# EAGLE board eeprom_programmer (EAGLE 9.6.2)
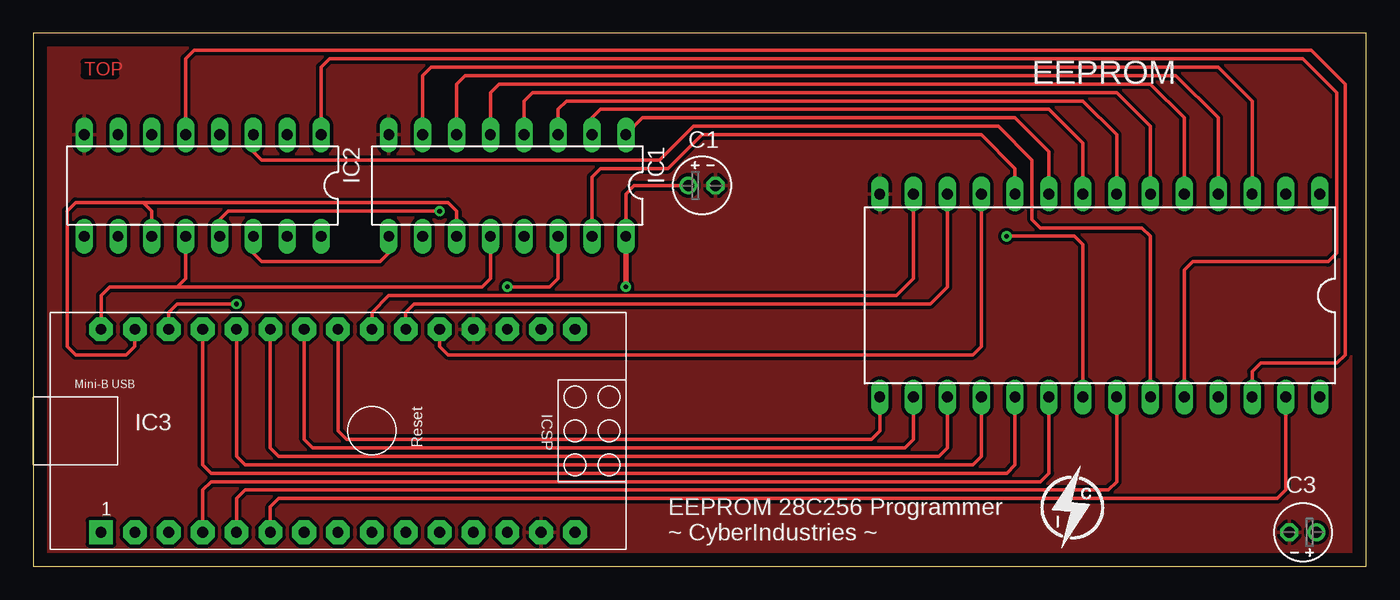
[diagram p0: board, top side]
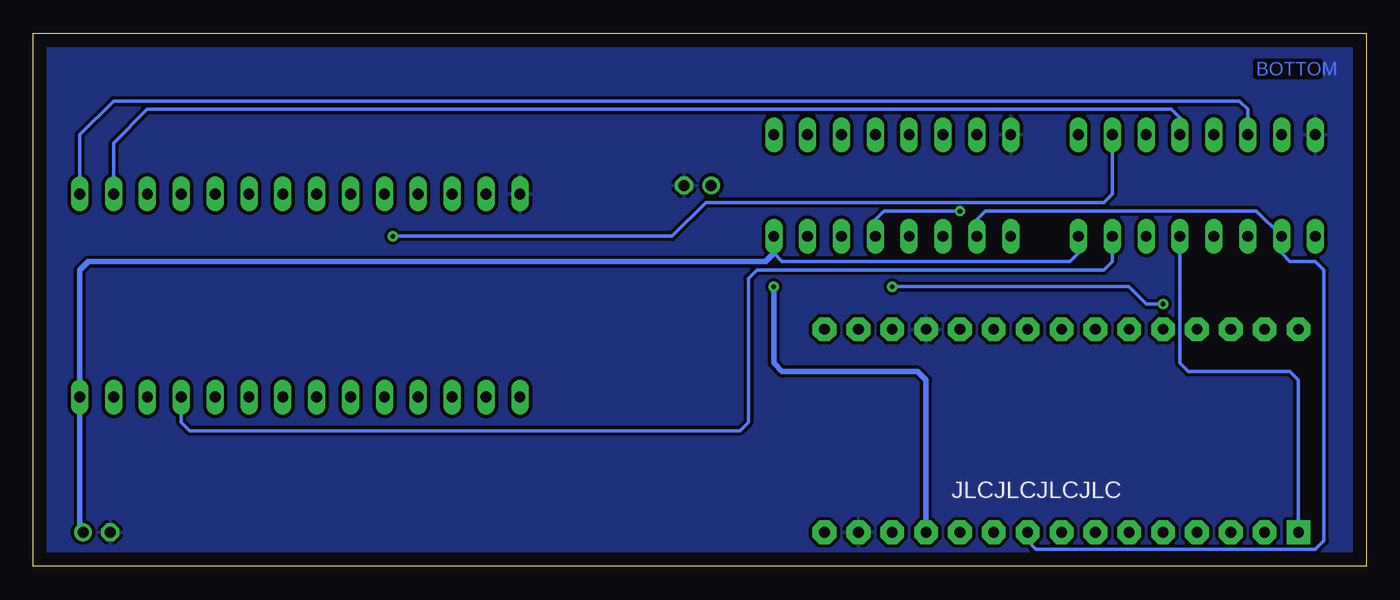
[diagram p1: board, bottom side, seen from below]

Size 100 x 40 mm. Coordinates in mm from the lower left corner, seen from the top.
Outline: 0,0 100,0 100,40 0,40 0,0
Copper layers (1*16): Top 0.035mm / dielectric 1.5mm / Bottom 0.035mm
Design rules "default": minimum track width 6mil, minimum drill 0.35mm, track to track 6mil, track to pad 6mil, pad to pad 6mil, via to via 6mil, smd to smd 6mil, copper to edge 40mil, drill to drill 6mil, minimum pad ring 10mil, minimum via ring 8mil, stop-mask expansion 4mil, vias tented up to drill 0mil, thermal gap 10mil

## Footprints (pad centres in the part's own frame; a part is rotated, then mirrored left to right if it is on the bottom)
E2-4 = drill 0.813 pad 1.27: + -1.016,0 | drill 0.813 pad 1.27 octagon: - 1.016,0
DIL28-6 = drill 0.813 long: 1 -16.51,-7.62; 2 -13.97,-7.62; 3 -11.43,-7.62; 4 -8.89,-7.62; 5 -6.35,-7.62; 6 -3.81,-7.62; 7 -1.27,-7.62; 8 1.27,-7.62; 9 3.81,-7.62; 10 6.35,-7.62; 11 8.89,-7.62; 12 11.43,-7.62; 13 13.97,-7.62; 14 16.51,-7.62; 15 16.51,7.62; 16 13.97,7.62; 17 11.43,7.62; 18 8.89,7.62; 19 6.35,7.62; 20 3.81,7.62; 21 1.27,7.62; 22 -1.27,7.62; 23 -3.81,7.62; 24 -6.35,7.62; 25 -8.89,7.62; 26 -11.43,7.62; 27 -13.97,7.62; 28 -16.51,7.62
DIL16 = drill 0.813 long: 1 -8.89,-3.81; 2 -6.35,-3.81; 3 -3.81,-3.81; 4 -1.27,-3.81; 5 1.27,-3.81; 6 3.81,-3.81; 7 6.35,-3.81; 8 8.89,-3.81; 9 8.89,3.81; 10 6.35,3.81; 11 3.81,3.81; 12 1.27,3.81; 13 -1.27,3.81; 14 -3.81,3.81; 15 -6.35,3.81; 16 -8.89,3.81
ARDUINO_NANO = drill 0.8 pad 1.778 square: 1 -20.32,-7.62 | drill 0.8 pad 1.778 octagon: 2 -17.78,-7.62; 3 -15.24,-7.62; 4 -12.7,-7.62; 5 -10.16,-7.62; 6 -7.62,-7.62; 7 -5.08,-7.62; 8 -2.54,-7.62; 9 0,-7.62; 10 2.54,-7.62; 11 5.08,-7.62; 12 7.62,-7.62; 13 10.16,-7.62; 14 12.7,-7.62; 15 15.24,-7.62; 16 15.24,7.62; 17 12.7,7.62; 18 10.16,7.62; 19 7.62,7.62; 20 5.08,7.62; 21 2.54,7.62; 22 0,7.62; 23 -2.54,7.62; 24 -5.08,7.62; 25 -7.62,7.62; 26 -10.16,7.62; 27 -12.7,7.62; 28 -15.24,7.62; 29 -17.78,7.62; 30 -20.32,7.62

## Placement (x,y rotation side)
C1  1uF  [E2-4]  50.16,28.57 0 top
C3  1uF  [E2-4]  95.25,2.54 180 top
EEPROM  AT28C256-28DIP  [DIL28-6]  80.01,20.32 180 top
IC1  74HC595N  [DIL16]  35.56,28.57 180 top
IC2  74HC595N  [DIL16]  12.7,28.57 180 top
IC3  [ARDUINO_NANO]  25.4,10.16 0 top
U$1  LOGO-CYBERINDUSTRIES"  [LOGO-SMALL]  75.56,1.27 0 top

## Library data of the parts
C1 C3 = ITIS
EEPROM = atmel-custom
IC1 IC2 = 74xx-eu
IC3 = CiniTechLibrary
U$1 = CyberLibrary

## Nets
A0: EEPROM.10 IC1.15
A1: EEPROM.9 IC1.1
A2: EEPROM.8 IC1.2
A3: EEPROM.7 IC1.3
A4: EEPROM.6 IC1.4
A5: EEPROM.5 IC1.5
A6: EEPROM.4 IC1.6
A7: EEPROM.3 IC1.7
A8: EEPROM.25 IC2.15
A9: EEPROM.24 IC2.1
A10: EEPROM.21 IC2.2
A11: EEPROM.23 IC2.3
A12: EEPROM.2 IC2.4
A13: EEPROM.26 IC2.5
A14: EEPROM.1 IC2.6
A15: IC2.7
CE: EEPROM.20 IC3.4
G: IC1.13 IC2.13 IC3.1
GND: C1.- C3.- EEPROM.14 IC1.8 IC2.8 IC3.14 IC3.19
IO0: EEPROM.11 IC3.20
IO1: EEPROM.12 IC3.21
IO2: EEPROM.13 IC3.22
IO3: EEPROM.15 IC3.23
IO4: EEPROM.16 IC3.24
IO5: EEPROM.17 IC3.25
IO6: EEPROM.18 IC3.26
IO7: EEPROM.19 IC3.27
N$1: IC1.9 IC2.14
OE: EEPROM.22 IC3.5
RCK: IC1.12 IC2.12 IC3.30
SCK: IC1.11 IC2.11 IC3.29
SCL: IC1.10 IC2.10 IC3.9
SER: IC1.14 IC3.28
VCC: C1.+ C3.+ EEPROM.28 IC1.16 IC2.16 IC3.12
VIN: IC3.15
WE: EEPROM.27 IC3.6

## Tracks (layer width: path | path; a pad name or v marks a point on that pad's centre or on a via)
A0
  Top 0.254: IC1.15 41.91,29.21 42.55,29.84 47.62,29.84 50.16,32.38 71.12,32.38 73.66,29.84 EEPROM.10
A1
  Top 0.254: EEPROM.9 76.2,31.11 73.66,33.66 45.72,33.66 IC1.1
A2
  Top 0.254: EEPROM.8 78.74,31.75 76.2,34.29 42.55,34.29 41.91,33.66 IC1.2
A3
  Top 0.254: EEPROM.7 81.28,32.38 78.74,34.92 40.01,34.92 39.37,34.29 IC1.3
A4
  Top 0.254: EEPROM.6 83.82,33.02 81.28,35.56 37.47,35.56 36.83,34.92 IC1.4
A5
  Top 0.254: EEPROM.5 86.36,33.66 83.82,36.2 34.92,36.2 34.29,35.56 IC1.5
A6
  Top 0.254: EEPROM.4 88.9,33.66 85.72,36.83 32.38,36.83 31.75,36.2 IC1.6
A7
  Top 0.254: EEPROM.3 91.44,34.92 88.9,37.47 29.84,37.47 29.21,36.83 IC1.7
A8
  Bottom 0.254: IC2.15 19.05,22.86 19.68,22.23 45.72,22.23 46.35,21.59 46.35,10.79 46.99,10.16 88.27,10.16 88.9,10.79 EEPROM.25
A9
  Top 0.254: IC2.1 21.59,37.47 22.23,38.1 95.25,38.1 97.79,35.56 97.79,23.5 97.16,22.86 87,22.86 86.36,22.23 EEPROM.24
A10  (via drill 0.35)
  Top 0.254: v73.03,24.77 78.11,24.77 78.74,24.13 EEPROM.21
  Bottom 0.254: IC2.2 19.05,27.94 19.68,27.3 49.53,27.3 52.07,24.77 v73.03,24.77
A11
  Top 0.254: IC2.3 16.51,31.11 17.14,30.48 46.99,30.48 49.53,33.02 72.39,33.02 74.93,30.48 74.93,26.04 75.56,25.4 83.19,25.4 83.82,24.77 EEPROM.23
A12
  Bottom 0.254: EEPROM.2 93.98,31.75 91.44,34.29 14.61,34.29 13.97,33.66 IC2.4
A13
  Top 0.254: IC2.5 11.43,38.1 12.06,38.73 95.89,38.73 98.42,36.2 98.42,15.88 97.79,15.24 92.08,15.24 91.44,14.61 EEPROM.26
A14
  Bottom 0.254: IC2.6 8.89,34.29 9.53,34.92 93.98,34.92 96.52,32.38 EEPROM.1
CE
  Top 0.254: IC3.4 12.7,5.71 13.34,6.35 75.56,6.35 76.2,6.99 EEPROM.20
G  (via drill 0.35)
  Top 0.254: IC2.13 13.97,26.04 14.61,26.67 30.46,26.67 v30.48,26.65
  Bottom 0.254: IC3.1 5.08,13.97 5.71,14.61 13.34,14.61 13.97,15.24 IC2.13 | v30.48,26.65 30.5,26.67 36.2,26.67 36.83,26.04 IC1.13
GND
  pour Top (isolate 0.254): -1.27,41.27 -1.27,0 -0.64,-0.64 100.97,-0.64 101.6,0 101.6,41.27 100.97,41.91 -0.64,41.91
  pour Bottom (isolate 0.254): -1.27,41.27 -1.27,-0.64 -0.64,-1.27 104.14,-1.27 104.14,41.27
IO0
  Top 0.254: IC3.20 30.48,16.51 31.11,15.88 70.48,15.88 71.12,16.51 EEPROM.11
IO1
  Top 0.254: EEPROM.12 68.58,20.95 67.31,19.68 28.57,19.68 27.94,19.05 IC3.21
IO2
  Top 0.254: IC3.22 25.4,19.05 26.67,20.32 64.77,20.32 66.04,21.59 EEPROM.13
IO3
  Top 0.254: EEPROM.15 63.5,10.16 62.87,9.53 23.5,9.53 22.86,10.16 IC3.23
IO4
  Top 0.254: EEPROM.16 66.04,9.53 65.41,8.89 20.95,8.89 20.32,9.53 IC3.24
IO5
  Top 0.254: EEPROM.17 68.58,8.89 67.94,8.26 18.41,8.26 17.78,8.89 IC3.25
IO6
  Top 0.254: EEPROM.18 71.12,8.26 70.48,7.62 15.88,7.62 15.24,8.26 IC3.26
IO7
  Top 0.254: EEPROM.19 73.66,7.62 73.03,6.99 13.34,6.99 12.7,7.62 IC3.27
N$1
  Top 0.254: IC2.14 16.51,23.5 17.14,22.86 26.04,22.86 26.67,23.5 IC1.9
OE
  Top 0.254: IC3.5 15.24,5.08 15.88,5.71 80.64,5.71 81.28,6.35 EEPROM.22
RCK
  Top 0.254: 10.79,20.95 5.71,20.95 5.08,20.32 IC3.30 | 10.79,20.95 11.43,21.59 IC2.12 | 10.79,20.95 33.66,20.95 34.29,21.59 IC1.12
SCK
  Top 0.254: IC3.29 7.62,16.51 6.99,15.88 3.17,15.88 2.54,16.51 2.54,26.67 3.17,27.3 8.26,27.3 | 8.26,27.3 8.89,26.67 IC2.11 | 8.26,27.3 31.11,27.3 31.75,26.67 IC1.11
SCL
  Bottom 0.254: IC1.10 29.21,26.04 28.57,26.67 8.26,26.67 IC2.10 6.35,23.5 5.71,22.86 3.81,22.86 3.17,22.23 3.17,1.91 3.81,1.27 24.77,1.27 25.4,1.91 IC3.9
SER  (via drill 0.35)
  Top 0.254: IC1.14 39.37,21.59 38.73,20.95 35.58,20.95 v35.56,20.98 | v15.24,19.68 10.79,19.68 10.16,19.05 IC3.28
  Bottom 0.254: v35.56,20.98 17.8,20.98 16.51,19.68 v15.24,19.68
VCC  (via drill 0.35)
  Top 0.254: IC1.16 44.45,27.94 45.09,28.57 C1.+
  Top 0.406: v44.45,20.98 IC1.16
  Bottom 0.254: IC2.16 21.59,23.5 22.23,22.86 43.81,22.86 44.45,23.5
  Bottom 0.406: IC3.12 33.02,13.97 33.66,14.61 43.81,14.61 44.45,15.24 v44.45,20.98 | IC1.16 44.45,23.5 45.09,22.86 95.89,22.86 96.52,22.23 EEPROM.28 96.52,2.79 C3.+
WE
  Top 0.254: IC3.6 17.78,4.45 18.41,5.08 93.34,5.08 93.98,5.71 EEPROM.27

## Text on the board
Top: TOP
Bottom: BOTTOM
tNames: EEPROM 28C256 Programmer / ~ CyberIndustries ~
bNames: JLCJLCJLCJLC